# Altium PCB AIWAC-TF_CARD-V02.PcbDoc
Units mm, origin at the board's own origin, x right, y up, seen from the top; angles counter-clockwise.
Board outline 21.97 x 27.94 mm, 2 copper layers (Top Layer, Bottom Layer); 19 components, 14 nets, 63 pads, 67 vias.
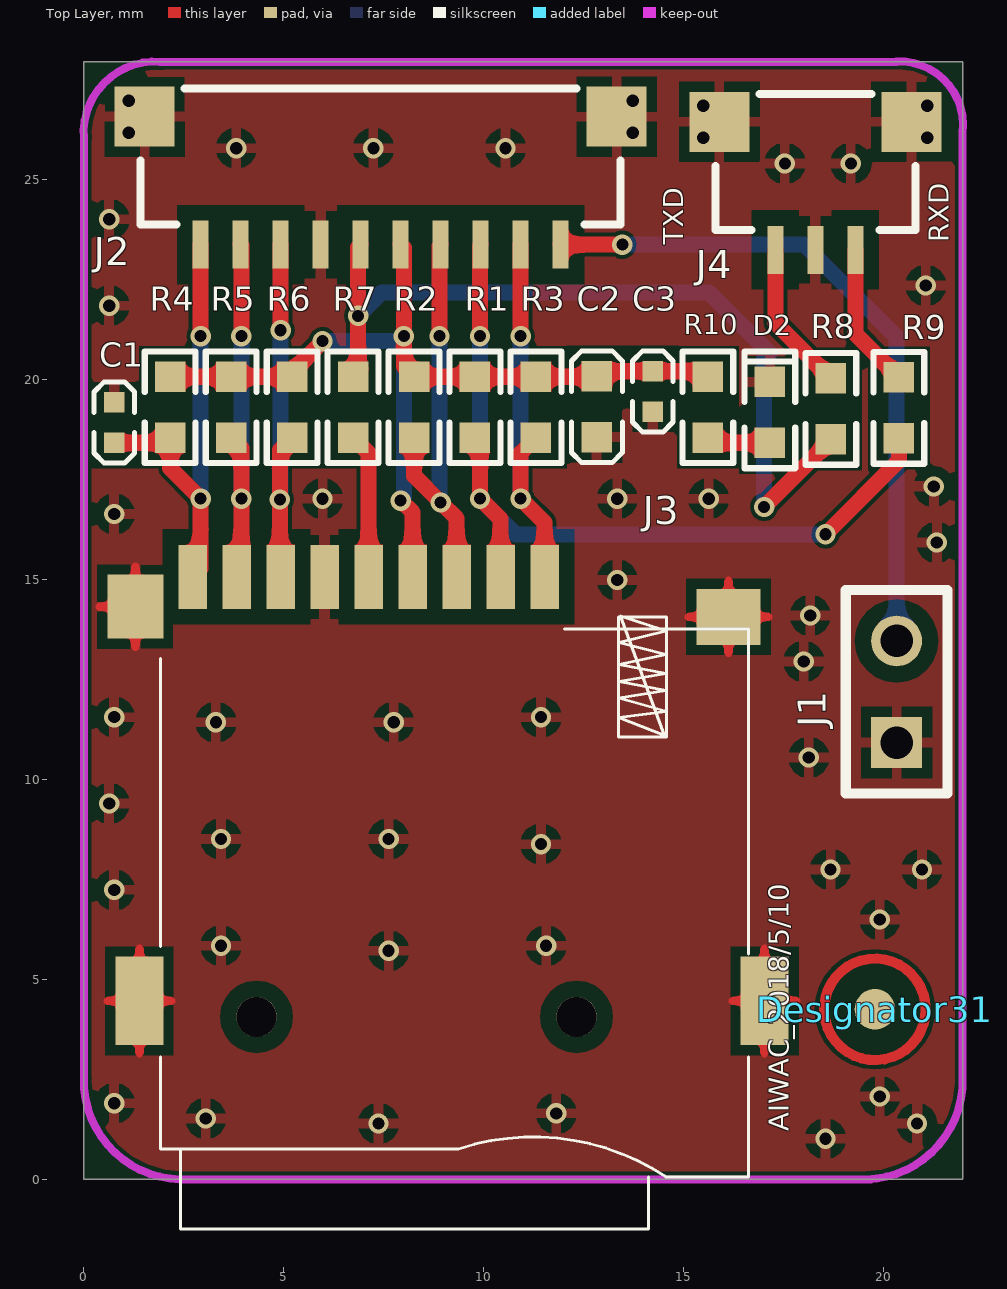
[diagram p0: Top Layer view]
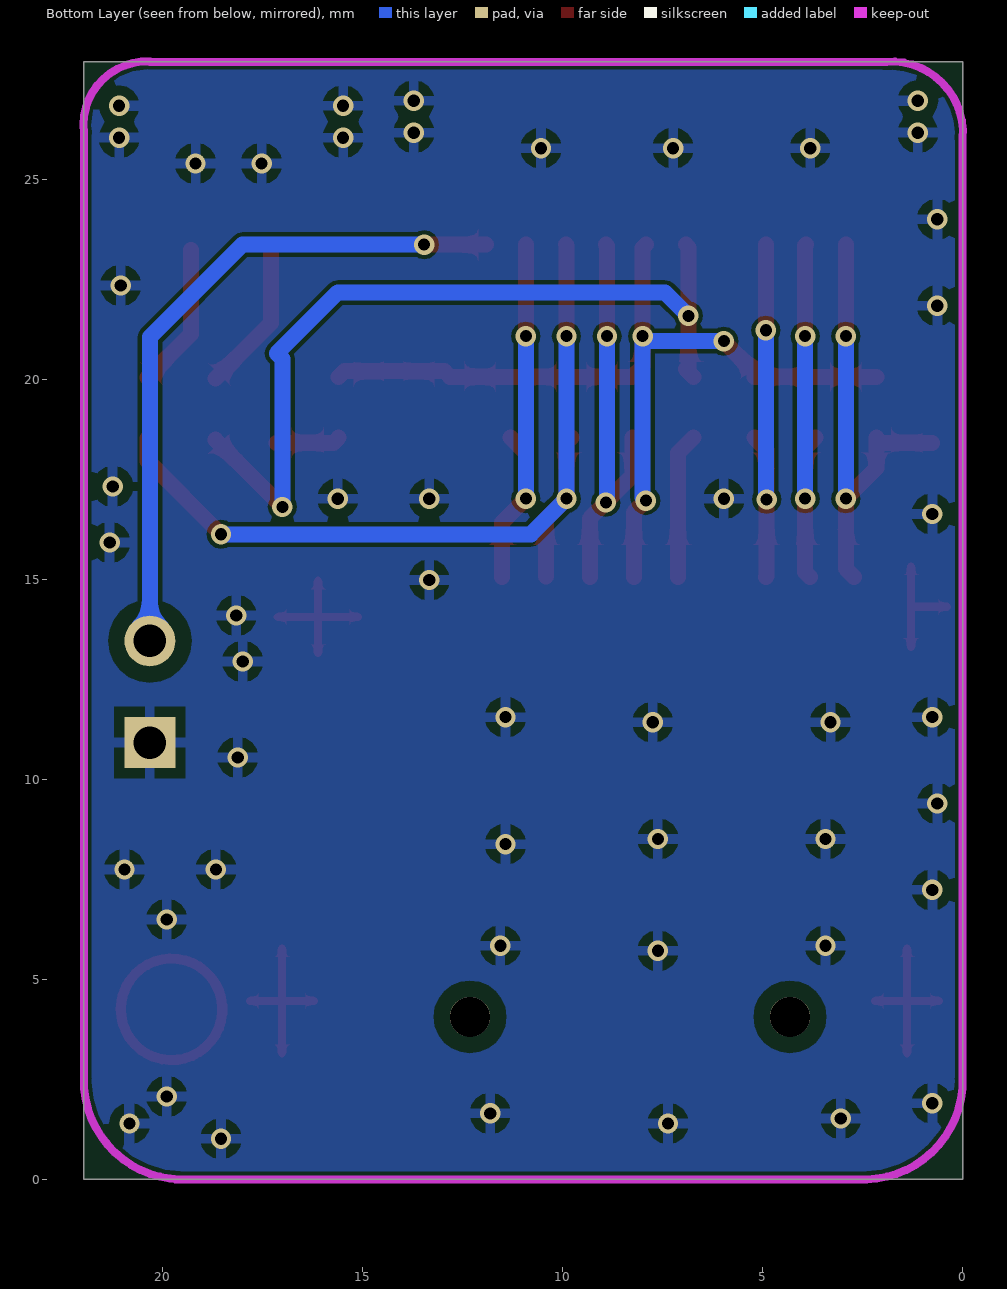
[diagram p1: Bottom Layer view, seen from below]
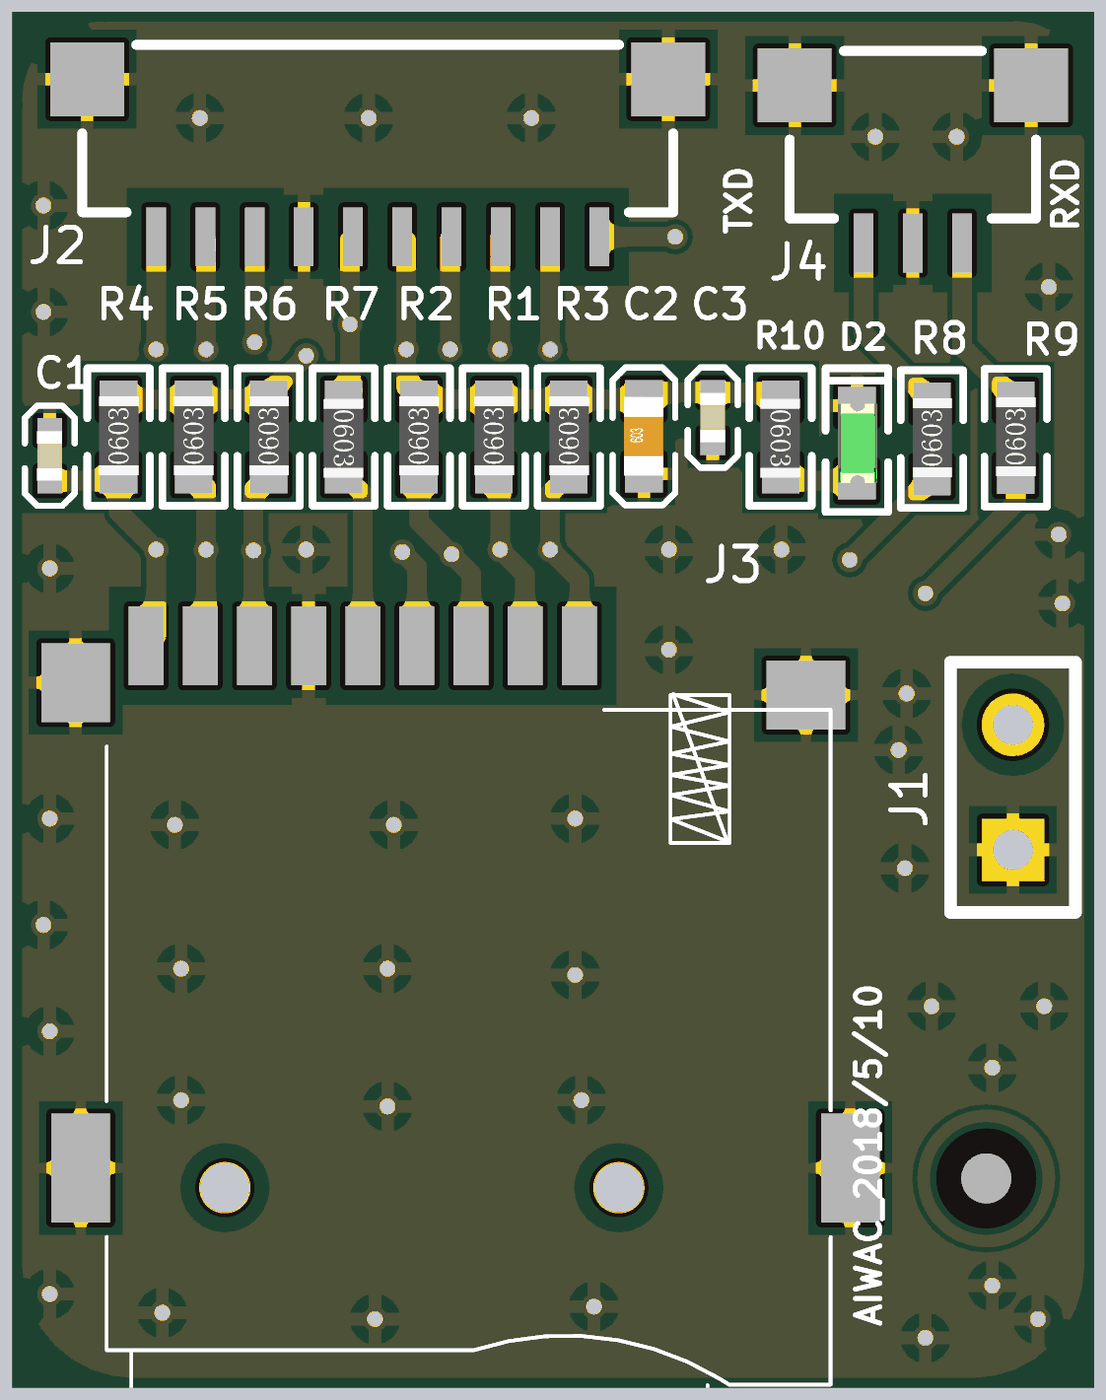
[diagram p2: 3D render of the assembled board from above, using the file's embedded part models]

## Layer stack, top to bottom
Top Solder: solder mask 0.0102, Solder Resist, Dk 3.5
Top Layer: signal copper 0.0356
Dielectric 1: dielectric 0.32, FR-4, Dk 4.8
Bottom Layer: signal copper 0.0356
Bottom Solder: solder mask 0.0102, Solder Resist, Dk 3.5

## Board outline
0,0 0,27.94 21.971,27.94 21.971,0

## Design rules (kind name [scope] priority, off if disabled: settings)
Clearance [All] p1: gap=0.1 except(0.4: SMDPad-Poly THPad-Poly)
HoleSize HoleSize_1 [All] p1: absolutevalues=TRUE maxlimit=2.54 minlimit=0.025 maxpercent=80.000 minpercent=20.000
HoleSize [All] p2: absolutevalues=TRUE maxlimit=0.508 minlimit=0.254 maxpercent=80.000 minpercent=20.000
PolygonConnect [All] p1: connectstyle=Relief reliefconductorwidth=0.254 reliefentries=4 polygonreliefangle="90 Angle" airgapwidth=0.254
RoutingVias [All] p1: holewidth=0.301 width=0.508 viastyle="Through Hole" minholewidth=0.1 minwidth=0.254 maxholewidth=0.508 maxwidth=1.27
SolderMaskExpansion [All] p1: expansion=0.102
Width [All] p1: maxlimit=0.8 minlimit=0.1 preferedwidth=0.6
29 further rules are at their usual default settings.

## Components (designator, comment, footprint, x,y, rotation, side; value= is the part's Value field where it differs from the comment)
C1 "104J10V" C0402 0.762,18.415 r90 top locked
C2 "106K50V" C0603 12.827,18.555 r90 top locked
C3 "104J10V" C0402 14.224,19.19 r90 top locked
D2 "LED0603G" D-LED0603G 17.15,18.415 r90 top locked
Designator31 "Comment" MarkGlobal1 19.775,4.25 r0 top locked
J1 "S2.54-2P" S2.54-2P 20.32,10.922 r90 top locked
J2 "SH1.0-T-1-LT-10A" J-SH1.0-T-1-LT-10A 9.321,25.667 r180 top locked
J3 "TF_CARD" SD_CARD_7 11.518,15.064 r90 top locked
J4 "SH1.0-T-1-LT-3A" J-SH1.0-T-1-LT-3A 17.288,23.241 r0 top locked
R1 "47KF" R0603 9.779,18.542 r90 top locked
R2 "10KF" R0603 8.255,18.542 r90 top locked
R3 "47KF" R0603 11.303,18.542 r90 top locked
R4 "47KF" R0603 2.159,18.542 r90 top locked
R5 "47KF" R0603 3.683,18.542 r90 top locked
R6 "47KF" R0603 5.207,18.542 r90 top locked
R7 "33RF" R0603 6.731,20.066 r270 top locked
R8 "33RF" R0603 18.675,18.501 r90 top locked
R9 "33RF" R0603 20.375,18.526 r90 top locked
R10 "2KF" R0603 15.6,20.066 r270 top locked

## Footprints (in the part's own frame and the unit in brackets; to place one, negate y for a bottom-side part, rotate by r counter-clockwise, add the part's x,y. Pads: shape width x height; smd on the part's side, far side on the other; paste and mask are expansions set on the pad)
C0402 [mil]
  rect 20x20 smd: 1(0,0) 2(40,0)
  silkscreen extent -20,-20 60,20, body extent 0,-10 40,10, height 20
C0603 [mil]
  rect 30x30 smd: 1(0,0) 2(60,0)
  silkscreen extent -25,-25 85,25, body extent -1,-15 61,16, height 12
D-LED0603G [mil]
  rect 30x30 smd: 1(0,0) 2(60,0)
  silkscreen extent -25,-25 90,25, body extent -2,-16 62,15, height 24
J-SH1.0-T-1-LT-3A [mm]
  rect 0.4x1.2 smd: 1(0,0) 2(1,0) 3(2,0)
  rect 1.5x1.5 smd: 4(-1.4,3.2) 5(3.4,3.2)
  silkscreen extent -1.5,0.5 3.5,3.9
J-SH1.0-T-1-LT-10A [mm] "接插件SH1.0-T-1-LT-10A，A33TF卡槽"
  rect 0.4x1.2 smd: 1(-2.6,2.3) 2(-1.6,2.3) 3(-0.6,2.3) 4(0.4,2.3) 5(1.4,2.3) 6(2.4,2.3) 7(3.4,2.3) 8(4.4,2.3) 9(5.4,2.3) 10(6.4,2.3)
  rect 1.5x1.5 smd: 11(-4,-0.9) 12(7.8,-0.9)
  silkscreen extent -4.1,-1.6 7.9,1.8
MarkGlobal1 [mil]
  round 40 smd: 0(0.1,0.1)
  Top Layer circle w10: c0.1,0.1 r50
R0603 [mil]
  rect 30x30 smd: 1(0,0) 2(60,0)
  silkscreen extent -25,-25 85,25, body extent 0,-16 62,15, height 18
S2.54-2P [mil]
  rect 50x50 hole 32: 1(0,0)
  round 50 hole 32: 2(100,0)
  silkscreen extent -50,-50 150,50, body extent -50,-50 150,50, height 315
SD_CARD_7 [mil] "This is 9信号的，适用于A33"
  rect 63x28 smd: 1(0,0) 2(0,43.3) 3(0,86.61) 4(0,129.92) 5(0,173.22) 6(0,216.53) 7(0,259.84) 8(0,303.15) 9(0,346.45)
  rect 63x55 smd: 10(-29.37,402.7)
  rect 87x47 smd: 11(-417.32,398.7) 13(-417.32,-216.54)
  rect 55x63 smd: 12(-39.37,-181.11)
  round 39.37 / inner round 60 / far side round 39.37 hole 39.37: " "(-433.07,-31.5) " "(-433.07,283.46)
  Top Layer pour cut-out: -405.14,-31.5 -406.1,-24.27 -408.89,-17.54 -413.32,-11.75 -419.11,-7.32 -425.84,-4.53 -433.07,-3.57 -440.3,-4.53 -447.03,-7.32 -452.82,-11.75 -457.25,-17.54 -460.04,-24.27 -461,-31.5 -460.04,-38.73 -457.25,-45.46 -452.82,-51.25 -447.03,-55.68 -440.3,-58.47 -433.07,-59.43 -425.84,-58.47 -419.11,-55.68 -413.32,-51.25 -408.89,-45.46 -406.1,-38.73 -405.14,-31.5
  Top Layer pour cut-out: -405.14,283.46 -406.1,290.69 -408.89,297.42 -413.32,303.21 -419.11,307.64 -425.84,310.43 -433.07,311.39 -440.3,310.43 -447.03,307.64 -452.82,303.21 -457.25,297.42 -460.04,290.69 -461,283.46 -460.04,276.23 -457.25,269.5 -452.82,263.71 -447.03,259.28 -440.3,256.49 -433.07,255.53 -425.84,256.49 -419.11,259.28 -413.32,263.71 -408.89,269.5 -406.1,276.23 -405.14,283.46
  Top Layer pour cut-out: -5.87,-143.61 -5.87,-218.61 -72.87,-218.61 -72.87,-143.61 -5.87,-143.61
  Top Layer pour cut-out: -367.82,-187.04 -367.82,-246.04 -466.82,-246.04 -466.82,-187.04 -367.82,-187.04
  Top Layer pour cut-out: -367.82,428.2 -367.82,369.2 -466.82,369.2 -466.82,428.2 -367.82,428.2
  Top Layer lines w6: 0.28,43.58 0,43.3
  Top Layer lines w8: -29.37,438.2 -29.37,402.7 ; -417.32,430.2 -417.32,398.7 ; -68.87,402.7 -29.37,402.7 ; 10.13,402.7 -29.37,402.7 ; -468.82,398.7 -417.32,398.7 ; -365.82,398.7 -417.32,398.7 ; -417.32,367.2 -417.32,398.7 ; -39.37,-141.61 -39.37,-181.11 ; -74.87,-181.11 -39.37,-181.11 ; -3.87,-181.11 -39.37,-181.11 ; -417.32,-185.04 -417.32,-216.54 ; -468.82,-216.54 -417.32,-216.54 ; -365.82,-216.54 -417.32,-216.54 ; -39.37,-220.61 -39.37,-181.11 ; -417.32,-248.04 -417.32,-216.54
  Bottom Layer pour cut-out: -405.14,-31.5 -406.1,-24.27 -408.89,-17.54 -413.32,-11.75 -419.11,-7.32 -425.84,-4.53 -433.07,-3.57 -440.3,-4.53 -447.03,-7.32 -452.82,-11.75 -457.25,-17.54 -460.04,-24.27 -461,-31.5 -460.04,-38.73 -457.25,-45.46 -452.82,-51.25 -447.03,-55.68 -440.3,-58.47 -433.07,-59.43 -425.84,-58.47 -419.11,-55.68 -413.32,-51.25 -408.89,-45.46 -406.1,-38.73 -405.14,-31.5
  Bottom Layer pour cut-out: -405.14,283.46 -406.1,290.69 -408.89,297.42 -413.32,303.21 -419.11,307.64 -425.84,310.43 -433.07,311.39 -440.3,310.43 -447.03,307.64 -452.82,303.21 -457.25,297.42 -460.04,290.69 -461,283.46 -460.04,276.23 -457.25,269.5 -452.82,263.71 -447.03,259.28 -440.3,256.49 -433.07,255.53 -425.84,256.49 -419.11,259.28 -413.32,263.71 -408.89,269.5 -406.1,276.23 -405.14,283.46
  silkscreen extent -642,-201 -39,378

## Part data
C1 C3: library part C0402X7R-104J10V, "贴片电容-陶瓷"
C2: library part C0603X7R-106K50V, "贴片电容-陶瓷"
D2: library part DLED-0603-G, "贴片二极管-LED"
J1: library part J-S2.54-2P, "单排排针-直针"
J2: "接插件SH1.0-T-1-LT-10A"
J3: "MS110-C10B-C16"
J4: "接插件-SH1.0-T-1-LT-3A"
R1 R3 R4 R5 R6: library part R0603-47KF, "贴片电阻-通用"
R2: library part R0603-10KF, "贴片电阻-通用"
R7 R8 R9: library part R0603-33RF, "贴片电阻-通用"
R10: library part R0603-2KF, "贴片电阻-通用"

## Via types
v1: diameter 0.508, hole 0.305, Top Layer to Bottom Layer, tented both sides, 48 vias
v2: diameter 0.508, hole 0.301, Top Layer to Bottom Layer, tented both sides, 19 vias

## Nets (pads, with @x,y where several pads share a name; then routed paths per layer and width w, separated by ;. In a path a pad name is that pad's centre, name@x,y a point inside that pad or via, vN(x,y) a via of type N, cw(c..) or ccw(c..) an arc to the next point about the centre after c; other vN are vias at no path point)
GND: C1.2 C2.1 C3.1 D2.2 J1.1 J2.7 J2.11 J2.12 J3.6 J3.10 J3.11 J3.12 J3.13 J4.2 J4.4 J4.5
  other v1: 18.542,1.016 7.366,1.397 20.828,1.397 3.048,1.524 11.811,1.651 0.762,1.905 19.9,2.075 7.62,5.715 3.429,5.842 11.557,5.842 19.9,6.5 0.762,7.239 18.669,7.747 20.955,7.747 11.43,8.382 3.429,8.509 7.62,8.509 0.635,9.398 18.125,10.55 3.302,11.43 7.747,11.43 0.762,11.557 11.43,11.557 18,12.95 18.161,14.097 13.335,14.986 21.325,15.925 0.762,16.637 5.969,17.018 13.335,17.018 15.621,17.018 21.25,17.325 0.635,21.844 21.05,22.35 0.635,24.003 17.526,25.4 19.177,25.4 3.81,25.781 7.239,25.781 10.541,25.781 15.488,26.041 21.088,26.041 1.121,26.167 13.721,26.167 15.488,26.841 21.088,26.841 1.121,26.967 13.721,26.967
NetD2_1: D2.1 R10.2 | length 1.6
  Top Layer w0.4: R10.2 15.727,18.415 D2.1
NetJ1_2: J1.2 J2.1 | length 16.9
  Top Layer w0.4: J2.1@11.922,23.368 v2(13.462,23.368)
  Bottom Layer w0.4: v2(13.462,23.368) 18.007,23.368 20.32,21.055 J1.2
NetJ3_5: J3.5 R7.2 | length 3.6
  Top Layer w0.4: R7.2 7.118,18.155 J3.5
NetJ4_1: J4.1 R8.2 | length 3.8
  Top Layer w0.4: J4.1 17.288,21.412 R8.2
NetJ4_3: J4.3 R9.2 | length 3.6
  Top Layer w0.4: J4.3 19.288,21.137 R9.2
SDC0-CLK: J2.6 R7.1 R8.1 | length 20.9
  Top Layer w0.4: R7.1 6.922,20.257 6.858,20.321 v2(6.858,21.59) 6.858,23.304 J2.6 J2.6 ; v2(17.007,16.812) 18.675,18.48 R8.1
  Bottom Layer w0.4: v2(6.858,21.59) 7.444,22.176 15.621,22.176 17.145,20.652 17.007,20.514 v2(17.007,16.812)
SDC0-CMD: J2.4 J3.3 R2.1 | length 10.4
  Top Layer w0.4: R2.1 8.255,17.59 v2(8.922,16.923) 9.318,16.527 J3.3 ; v2(8.89,21.082) 8.89,23.336 J2.4 J2.4@8.922,23.368
  Bottom Layer w0.4: v2(8.89,21.082) 8.89,16.955 v2(8.922,16.923)
SDC0-D0: J2.8 J3.7 R6.1 | length 10
  Top Layer w0.4: J3.7 4.922,15.068 4.9,15.09 v2(4.9,17) 4.9,18.235 R6.1 ; v2(4.922,21.229) J2.8@4.922,23.368
  Bottom Layer w0.4: v2(4.9,17) 4.922,17.022 v2(4.922,21.229)
SDC0-D1: J2.9 J3.8 R5.1 | length 10
  Top Layer w0.4: R5.1 3.937,18.288 v2(3.937,17.018) 3.937,15.183 J3.8 ; J2.9 3.937,23.353 v2(3.937,21.082)
  Bottom Layer w0.4: v2(3.937,17.018) v2(3.937,21.082)
SDC0-D2: J2.2 J3.1 R3.1 | length 10.2
  Top Layer w0.4: v2(10.922,21.082) J2.2 ; R3.1 10.922,18.161 v2(10.922,17.018) 11.518,16.422 J3.1
  Bottom Layer w0.4: v2(10.922,17.018) v2(10.922,21.082)
SDC0-D3: J2.3 J3.2 R1.1 R9.1 | length 22.2
  Top Layer w0.4: R1.1 9.906,18.415 v2(9.906,17.018) 10.411,16.513 J3.2@10.411,15.071 ; v2(9.906,21.082) 9.906,23.352 J2.3 J2.3 ; v2(18.542,16.129) 20.375,17.962 R9.1
  Bottom Layer w0.4: v2(9.906,21.082) v2(9.906,17.018) 10.795,16.129 v2(18.542,16.129)
T-CARD-DET: C1.1 J2.10 J3.9 R4.1 | length 11.7
  Top Layer w0.4: C1.1 2.032,18.415 R4.1 2.159,17.782 v2(2.922,17.019) 2.922,15.268 J3.9 ; v2(2.921,21.082) J2.10 J2.10
  Bottom Layer w0.4: v2(2.921,21.082) 2.921,17.02 v2(2.922,17.019)
VCC-3V0: C2.2 C3.2 J2.5 J3.4 R1.2 R2.2 R3.2 R4.2 R5.2 R6.2 R10.1 | length 23.4
  Top Layer w0.4: R4.2 R5.2 R6.2 5.207,20.193 v2(5.969,20.955) ; v2(7.922,16.97) 8.218,16.674 J3.4 ; J2.5 8.001,23.289 v2(8.001,21.082) 8.001,20.32 R2.2 R1.2 R3.2 12.814,20.066 C2.2 12.954,20.206 C3.2 15.46,20.206 R10.1
  Bottom Layer w0.4: v2(5.969,20.955) 7.874,20.955 v2(8.001,21.082) 8.001,17.049 v2(7.922,16.97)
pads on no net: "J3. " Designator31.0

## Polygon pours and split planes (outlines as drawn)
GND on Bottom Layer "top" (solid, remove dead copper, pour order 4): 0,27.94 21.971,27.94 21.971,0 0,0 0,27.94
GND on Top Layer "top" (solid, remove dead copper, pour order 6): 0,27.94 21.971,27.94 21.971,0 0,0 0,27.94

## Keep-outs
Keep-Out Layer:
  lines w0.2: 0,2.473 0,26.035 cw(c1.778,26.162) 1.905,27.94 20.32,27.94 ; 0,2.536 ccw(c2.473,2.473) 2.41,0 19.685,0 ; 19.558,0 ccw(c19.495,2.476) 21.971,2.54 ; 20.32,27.95 cw(c20.383,26.352) 21.971,26.162 21.971,2.286 ; 2.413,0 2.413,0

## Silkscreen, mask and mechanical layers (free items; w line width, h text height)
Top Overlay:
  text "RXD" at 21.625,23.425 h0.5 r90
  text "TXD" at 14.986,23.368 h0.5 r90
  text "AIWAC_2018/5/10" at 17.625,1.2 h0.5 r90
Mechanical 1:
  lines w0.2: 0,2.473 0,26.035 cw(c1.778,26.162) 1.905,27.94 20.32,27.94 ; 0,2.536 ccw(c2.473,2.473) 2.409,0 19.685,0 ; 19.558,0 ccw(c19.495,2.476) 21.971,2.54 ; 20.32,27.95 cw(c20.383,26.352) 21.971,26.162 21.971,2.286

## Text inside footprints (layer, text, board x,y; h text height)
J3: Mechanical 9 "9" at 2.718,14.81 h0.6; Mechanical 9 "6" at 6.018,14.81 h0.6; Mechanical 9 "4" at 8.218,14.81 h0.6; Mechanical 9 "2" at 10.418,14.81 h0.6; Mechanical 9 "3" at 9.318,14.81 h0.6; Mechanical 9 "1" at 11.518,14.81 h0.6; Mechanical 9 "5" at 7.118,14.81 h0.6; Mechanical 9 "7" at 4.918,14.81 h0.6; Mechanical 9 "8" at 3.818,14.81 h0.6